# Altium PCB Copy of PCB1.PcbDoc
Units mm, origin at the board's own origin, x right, y up, seen from the top; angles counter-clockwise.
Board outline 152.4 x 101.6 mm, 2 copper layers (Top Layer, Bottom Layer); 8 components, 16 nets, 70 pads, 0 vias.
Unrouted connection lines stored in the file: 7.
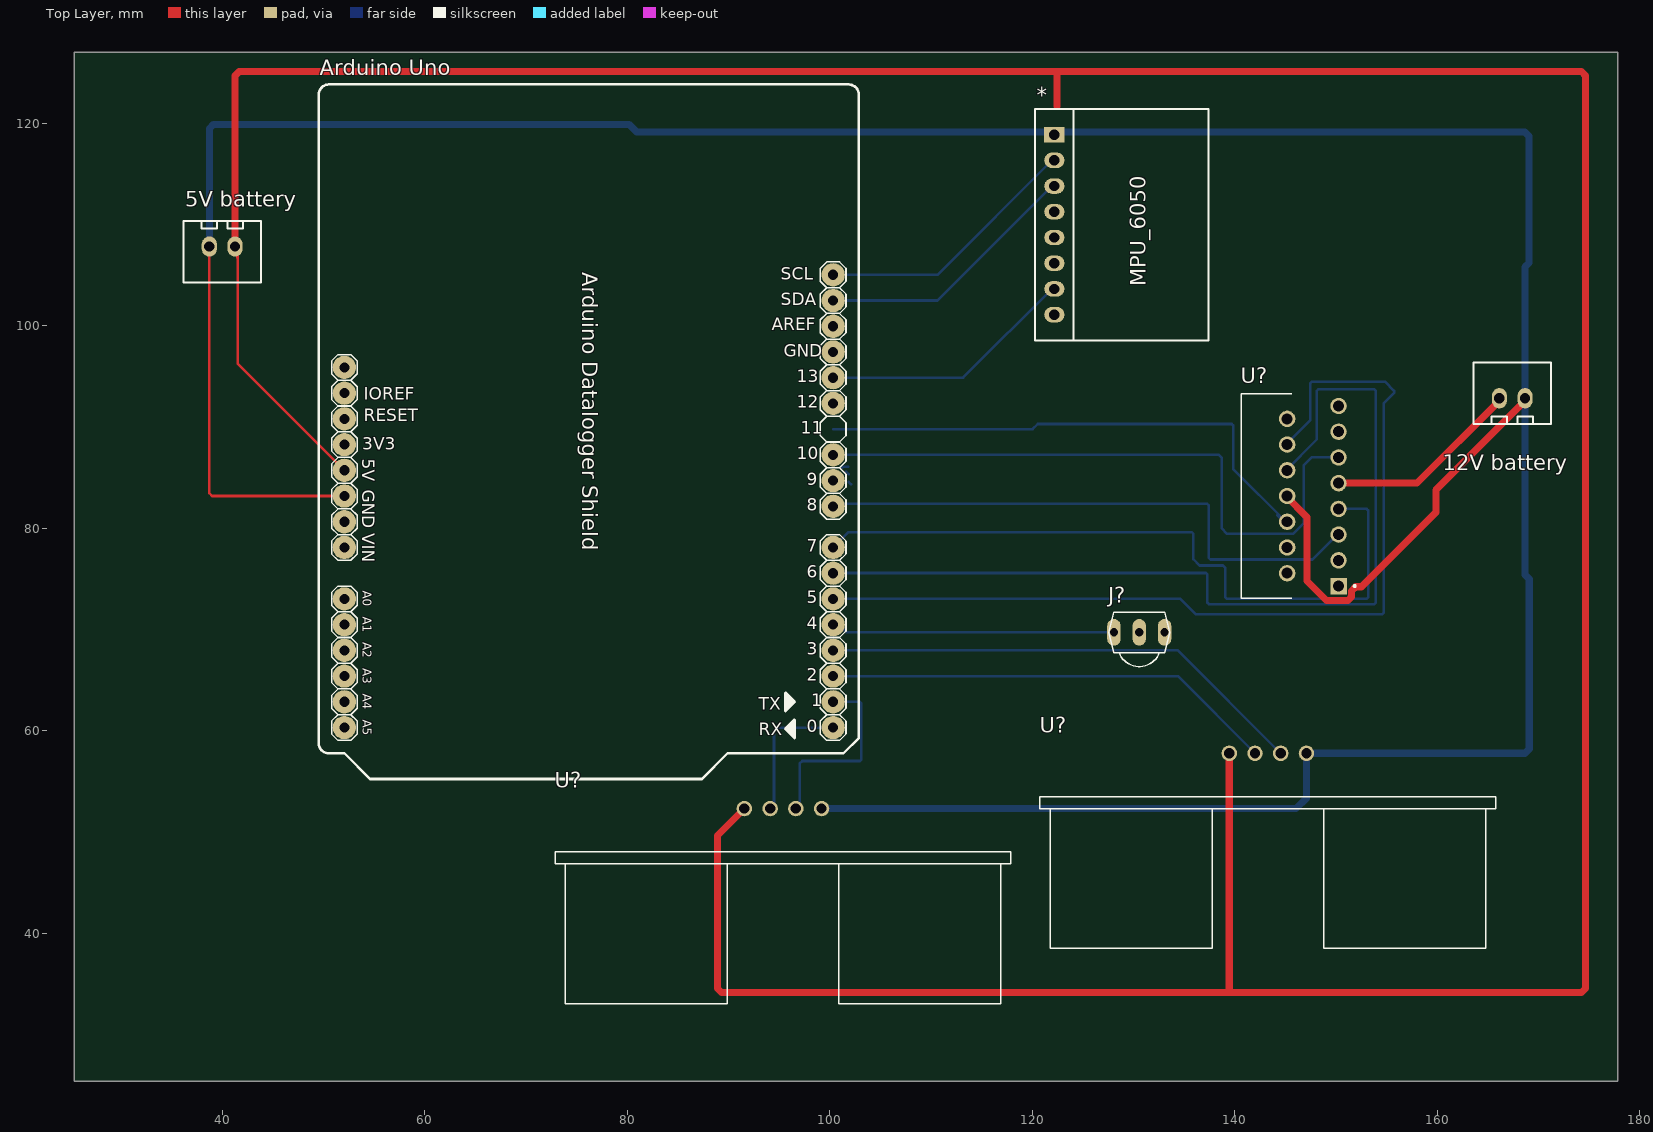
[diagram p0: Top Layer view]
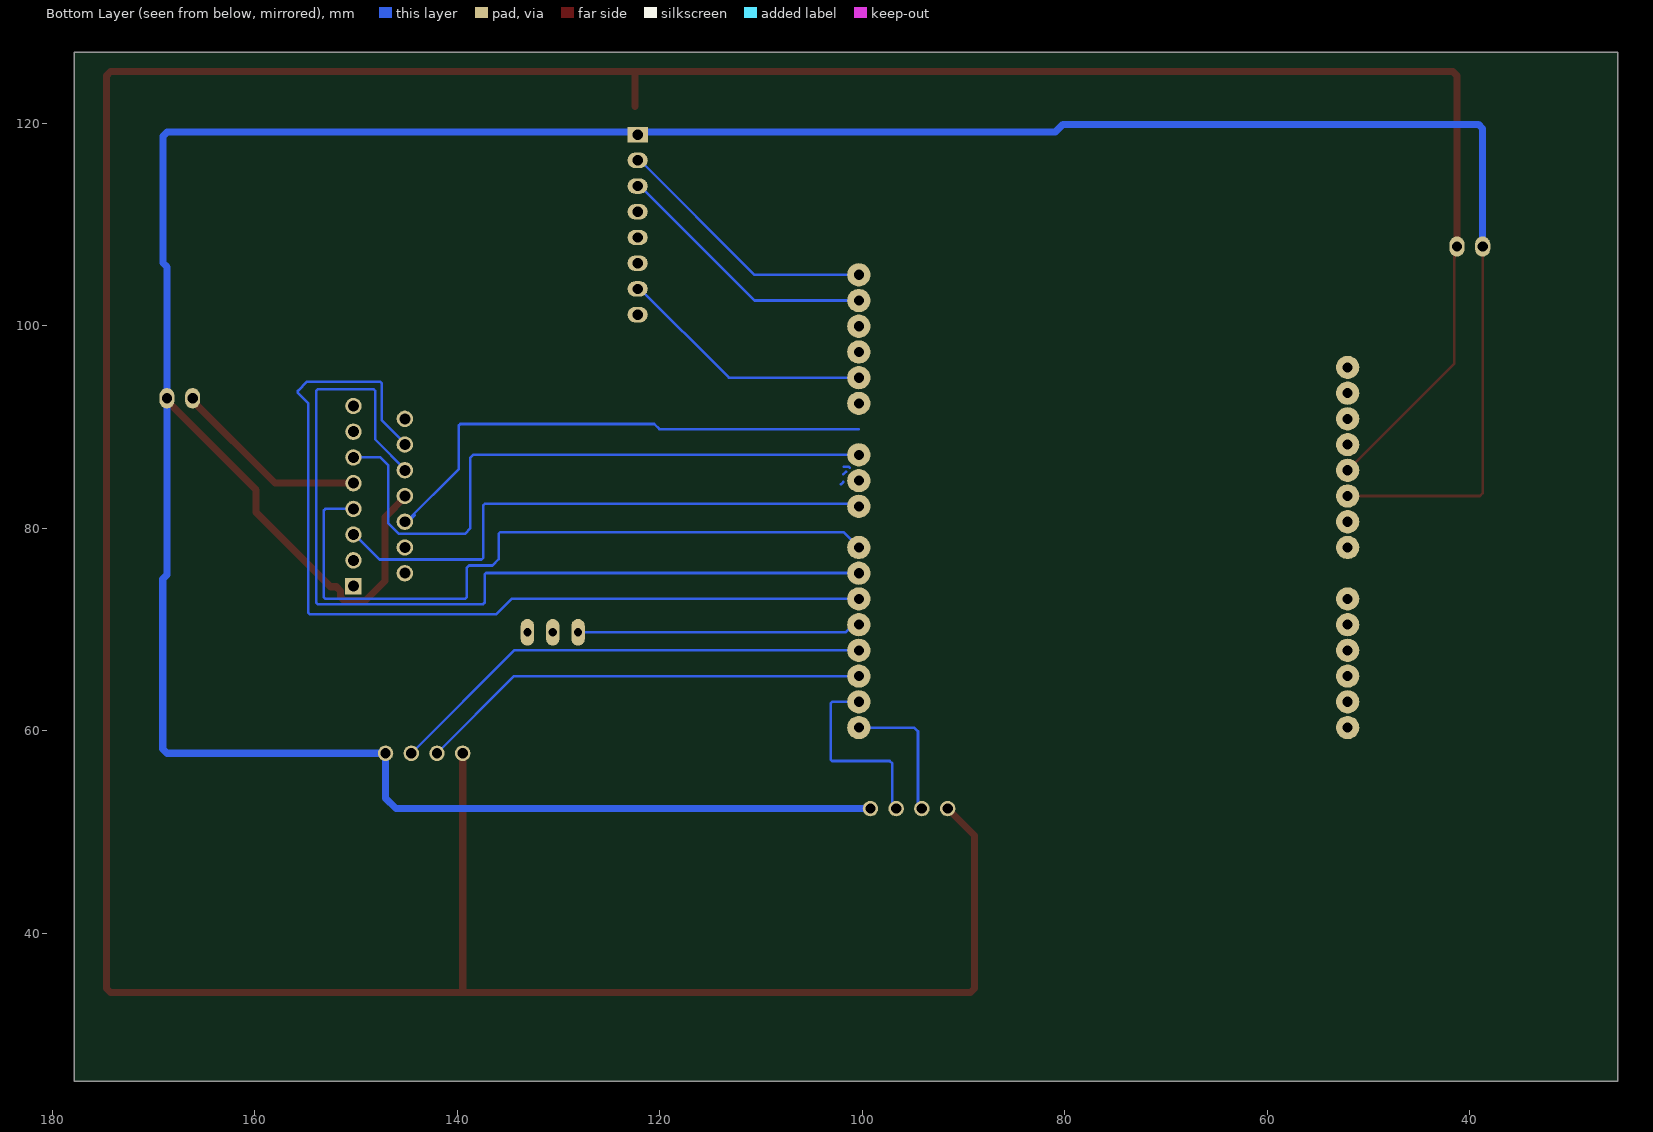
[diagram p1: Bottom Layer view, seen from below]

## Layer stack, top to bottom
Top Solder: solder mask 0.0102, Solder Resist, Dk 3.5
Top Layer: signal copper 0.0356
Dielectric 1: dielectric 0.32, FR-4, Dk 4.8
Bottom Layer: signal copper 0.0356
Bottom Solder: solder mask 0.0102, Solder Resist, Dk 3.5

## Board outline
25.4,25.4 177.8,25.4 177.8,127 25.4,127

## Design rules (kind name [scope] priority, off if disabled: settings)
Clearance [All] p1: gap=0.254 ignorepadtopadclearanceinfootprint=FALSE except(0: Arc-Hole Track-Hole SMDPad-Hole THPad-Hole Via-Hole Fill-Hole Poly-Hole Region-Hole Text-Hole)
PolygonConnect [All] p1: connectstyle=Relief reliefconductorwidth=0.254 reliefentries=4 polygonreliefangle="90 Angle" airgapwidth=0.254
RoutingVias [All] p1: holewidth=0.711 width=1.27 viastyle="Through Hole" minholewidth=0.711 minwidth=1.27 maxholewidth=0.711 maxwidth=1.27
SolderMaskExpansion [All] p1: expansion=0.102 istentingtop=FALSE
Width [All] p1: maxlimit=1 minlimit=0.7 preferedwidth=0.8 toplayer_prefwidth=0.7 minimp=50.000000 maximp=50.000000 favimp=50.000000
30 further rules are at their usual default settings.

## Classes and differential pairs
component class Sheet1: * "Arduino Uno" J? U?

## Components (designator, comment, footprint, x,y, rotation, side; value= is the part's Value field where it differs from the comment)
"5V battery" "5V battery" DATA_PIN_HEADER_2_2.54m 40.005,107.823 r180 top (schematic designator D*)
"12V battery" "5V battery" DATA_PIN_HEADER_2_2.54m 167.386,92.837 r0 top (schematic designator D*)
* "MPU_6050" MPU6050 122.174,109.982 r90 top
"Arduino Uno" "ARDUINO UNO" "ARDUINO UNO" 76.07,87.765 r270 top
J? "TSOP1838" TSOP18XX 130.557,69.75 r0 top
U? "HC-SR04" XCVR_HC-SR04 143.256,57.785 r0 top
U? "HC-SR04" XCVR_HC-SR04 95.377,52.324 r0 top
U? "L298N" TO127P2020X500X2100-15 150.241,74.295 r180 top

## Footprints (in the part's own frame and the unit in brackets; to place one, negate y for a bottom-side part, rotate by r counter-clockwise, add the part's x,y. Pads: shape width x height; smd on the part's side, far side on the other; paste and mask are expansions set on the pad)
"ARDUINO UNO" [mm]
  round 2.3 hole 1: 0(27.44,24.26) 1(24.9,24.26) 2(22.36,24.26) 3(19.82,24.26) 3.3V(-0.5,-24) 4(17.28,24.26) 5(14.74,24.26) 5V(2.04,-24) 6(12.2,24.26) 7(9.66,24.26) 8(5.596,24.26) 9(3.056,24.26) 10(0.516,24.26) 12(-4.564,24.26) 13(-7.104,24.26) A0(14.74,-24) A1(17.28,-24) A2(19.82,-24) A3(22.36,-24) A4(24.9,-24) A5(27.44,-24) AREF(-12.184,24.26) GND1(7.12,-24) GND2(4.58,-24) GND3(-9.644,24.26) IOREF(-5.58,-24) NC(-8.12,-24) RST(-3.04,-24) SCL(-17.264,24.26) SDA(-14.724,24.26) Vin(9.66,-24)
  round 2.3 on Mech15: 11(-2.024,24.26)
  silkscreen extent -36.06,-26.54 32.52,26.8
DATA_PIN_HEADER_2_2.54m [mm]
  oval 1.5x2 hole 1.016: 1(-1.27,0) 2(1.27,0)
  silkscreen extent -3.81,-2.54 3.81,3.56, body extent -3.59,-2.54 3.81,3.21, height 7.01
MPU6050 [mm]
  oval 1.524x2 hole 1.02: ADO(-6.35,0) GND(6.35,0) INT(-8.89,0) SCL(3.81,0) SDA(1.27,0) XCL(-3.81,0) XDA(-1.27,0)
  rect 1.524x2 hole 1.02: VCC(8.89,0)
  silkscreen extent -11.43,-15.24 11.43,1.91, body extent -10.55,-14.6 10.55,1.27, height 14.64
TO127P2020X500X2100-15 [mm]
  rect 1.62x1.62 hole 1.08: 1(0,0)
  round 1.62 hole 1.08: 2(5.08,-1.27) 3(0,-2.54) 4(5.08,-3.81) 5(0,-5.08) 6(5.08,-6.35) 7(0,-7.62) 8(5.08,-8.89) 9(0,-10.16) 10(5.08,-11.43) 11(0,-12.7) 12(5.08,-13.97) 13(0,-15.24) 14(5.08,-16.51) 15(0,-17.78)
  silkscreen extent -1.69,-18.99 9.63,1.21
TSOP18XX [mil]
  oval 52x104 hole 32: GND(-0.05,-1.05) OUT(-98.47,-1.05) VCC(98.38,-1.05)
  silkscreen extent -118,-134 118,78
XCVR_HC-SR04 [mm]
  round 1.53 hole 1.02: 1(-3.81,0) 2(-1.27,0) 3(1.27,0) 4(3.81,0)
  silkscreen extent -22.5,-19.27 22.5,-4.27

## Part data
"5V battery" "12V battery": library part DATA_PIN_HEADER_2_2.54m
J?: "IR Receiver and Demodulator", Package=None, Availability=Unavailable, MP=TSOP1838, Price=None
U? U?: "Ultrasonic Sensor Module", Package=None, Availability=Unavailable, MP=HC-SR04, Price=None
U?: "Dual Full Bridge Motor Driver 15-Pin(15+Tab) MULTIWATT V Tube", Package=None, Availability=Unavailable, MP=L298N, Price=None

## Nets (pads, with @x,y where several pads share a name; then routed paths per layer and width w, separated by ;. In a path a pad name is that pad's centre, name@x,y a point inside that pad or via, vN(x,y) a via of type N, cw(c..) or ccw(c..) an arc to the next point about the centre after c; other vN are vias at no path point)
+5: "5V battery.1" "Arduino Uno.5V" *.VCC J?.VCC U?.1@91.567,52.324 U?.1@139.446,57.785 | length 399.2
  Top Layer w0.254: 41.275,107.823 41.513,107.585 41.513,106.696 41.529,106.68 41.529,96.266 52.07,85.725
  Top Layer w0.7: 41.275,107.823 41.275,124.685 41.685,125.095 122.428,125.095 ; U?.1@91.567,52.324 88.9,49.657 88.9,34.573 89.31,34.163 139.446,34.163 ; 122.428,121.666 122.428,125.095 ; U?.1@139.446,57.785 139.446,34.163 ; 122.428,125.095 174.215,125.095 174.625,124.685 174.625,34.573 174.215,34.163 139.446,34.163
+12: "12V battery.1" U?.9 | length 19.6
  Top Layer w0.7: U?.9@150.114,84.455 157.984,84.455 166.116,92.587 166.116,92.837
ECHO1: "Arduino Uno.1" U?.3@96.647,52.324 | length 19.2
  Bottom Layer w0.254: U?.3@97.028,52.197 97.028,56.769 97.282,57.023 102.975,57.023 103.124,57.172 103.124,62.716 102.975,62.865 100.33,62.865
Echo2: "Arduino Uno.2" "Arduino Uno.3" U?.2@141.986,57.785 U?.3@144.526,57.785 | length 93.2
  Bottom Layer w0.254: 100.33,65.405 134.366,65.405 U?.2@141.986,57.785 ; 100.33,67.945 134.366,67.945 U?.3@144.526,57.785
ENA: "Arduino Uno.11" U?.6 | length 53.2
  Bottom Layer w0.254: 100.33,89.789 120.027,89.789 120.535,90.297 139.678,90.297 139.827,90.148 139.827,85.852 145.034,80.645 144.837,80.645 144.202,81.28 ; 101.209,85.963 101.336,86.09 101.833,86.09
ENB: "Arduino Uno.10" U?.11 | length 63.6
  Bottom Layer w0.254: 100.33,87.249 138.408,87.249 138.684,86.973 138.684,80.01 139.24,79.454 145.748,79.454 146.812,80.518 146.812,86.233 147.574,86.995 U?.11@150.114,86.995
GND: "5V battery.2" "12V battery.2" "Arduino Uno.GND2" *.GND J?.GND U?.4@99.187,52.324 U?.4@147.066,57.785 U?.8 | length 357.8
  Top Layer w0.254: 38.735,107.823 38.735,83.461 39.011,83.185 52.07,83.185
  Top Layer w0.7: U?.8@145.034,83.185 147.132,81.087 147.132,74.803 149.054,72.881 151.174,72.881 151.528,73.235 151.528,73.815 151.938,74.225 152.518,74.225 159.839,81.545 159.839,83.77 168.656,92.587 168.656,92.837
  Bottom Layer w0.7: 38.735,107.823 38.735,119.478 39.145,119.888 80.175,119.888 80.937,119.126 122.428,119.126 168.627,119.126 169.037,118.716 169.037,106.2 168.656,105.819 168.656,92.837 168.656,75.41 169.063,75.003 169.063,58.195 168.653,57.785 147.066,57.785 147.066,53.34 146.05,52.324 U?.4@99.187,52.324
IN1: "Arduino Uno.8" U?.5 | length 56.2
  Bottom Layer w0.254: 100.33,82.169 100.584,82.423 137.265,82.423 137.414,82.274 137.414,77.089 137.589,76.914 147.653,76.914 U?.5@150.114,79.375
IN2: "Arduino Uno.7" U?.7 | length 71.9
  Bottom Layer w0.254: 100.33,78.105 101.854,79.629 135.741,79.629 135.89,79.48 135.89,76.962 136.525,76.327 138.811,76.327 139.065,76.073 139.065,73.174 139.214,73.025 153.013,73.025 153.162,73.174 153.162,81.766 153.013,81.915 U?.7@150.114,81.915 ; 101.588,85.582 101.622,85.582 101.861,85.343 ; 101.861,84.581 102.114,84.328
IN3: "Arduino Uno.6" U?.10 | length 92.6
  Bottom Layer w0.254: 100.33,75.565 100.352,75.587 137.138,75.587 137.287,75.438 137.287,72.666 137.436,72.517 153.775,72.517 153.924,72.666 153.924,93.577 153.775,93.726 148.231,93.726 148.082,93.577 148.082,88.773 U?.10@145.034,85.725
IN4: "Arduino Uno.5" U?.12 | length 93.2
  Bottom Layer w0.254: 100.33,73.025 134.62,73.025 136.144,71.501 154.537,71.501 154.686,71.65 154.686,92.329 155.724,93.367 155.724,93.577 154.813,94.488 147.596,94.488 147.447,94.339 147.447,90.678 U?.12@145.034,88.265
INT: "Arduino Uno.13" *.INT | length 25.8
  Bottom Layer w0.254: 100.33,94.869 113.173,94.869 122.19,103.886 122.428,103.886
out: "Arduino Uno.4" J?.OUT | length 28
  Bottom Layer w0.254: 100.33,70.485 100.884,70.485 101.646,69.723 J?.OUT
SCL: "Arduino Uno.SCL" *.SCL | length 26.9
  Bottom Layer w0.254: 100.33,105.029 110.633,105.029 122.19,116.586 122.428,116.586
SDA: "Arduino Uno.SDA" *.SDA | length 26.9
  Bottom Layer w0.254: 100.33,102.489 110.633,102.489 122.19,114.046 122.428,114.046
Trig1: "Arduino Uno.0" U?.2@94.107,52.324 | length 13.7
  Bottom Layer w0.254: U?.2@94.488,52.197 94.488,59.944 94.869,60.325 100.33,60.325
pads on no net: "Arduino Uno.3.3V" "Arduino Uno.9" "Arduino Uno.12" "Arduino Uno.A0" "Arduino Uno.A1" "Arduino Uno.A2" "Arduino Uno.A3" "Arduino Uno.A4" "Arduino Uno.A5" "Arduino Uno.AREF" "Arduino Uno.GND1" "Arduino Uno.GND3" "Arduino Uno.IOREF" "Arduino Uno.NC" "Arduino Uno.RST" "Arduino Uno.Vin" *.ADO *.XCL *.XDA U?.1@150.241,74.295 U?.2@145.161,75.565 U?.3@150.241,76.835 U?.4@145.161,78.105 U?.13 U?.14 U?.15

## Text inside footprints (layer, text, board x,y; h text height)
"Arduino Uno": Top Overlay "5V" at 53.848,86.868 h1.21 r270; Top Overlay "A0" at 53.873,73.812 h0.86 r270; Top Overlay "AREF" at 94.273,99.579 h1.21; Top Overlay "GND" at 95.456,96.937 h1.21; Top Overlay "RESET" at 53.975,90.551 h1.21; Top Overlay "3V3" at 53.848,87.757 h1.21; Top Overlay "A1" at 53.873,71.272 h0.86 r270; Top Overlay "A2" at 53.873,68.732 h0.86 r270; Top Overlay "A3" at 53.873,66.192 h0.86 r270; Top Overlay "A4" at 53.873,63.652 h0.86 r270; Top Overlay "A5" at 53.873,61.112 h0.86 r270; Top Overlay "VIN" at 53.848,79.502 h1.21 r270; Top Overlay "GND" at 53.848,83.795 h1.21 r270; Top Overlay "IOREF" at 53.975,92.71 h1.21; Top Overlay "TX" at 92.989,62.103 h1.21; Top Overlay "RX" at 92.964,59.563 h1.21; Top Overlay "13" at 96.739,94.422 h1.21; Top Overlay "12" at 96.739,91.882 h1.21; Top Overlay "11" at 97.142,89.342 h1.21; Top Overlay "10" at 96.739,86.802 h1.21; Top Overlay "9" at 97.746,84.262 h1.21; Top Overlay "8" at 97.746,81.722 h1.21; Top Overlay "7" at 97.746,77.658 h1.21; Top Overlay "6" at 97.746,75.118 h1.21; Top Overlay "5" at 97.746,72.578 h1.21; Top Overlay "4" at 97.746,70.038 h1.21; Top Overlay "3" at 97.746,67.498 h1.21; Top Overlay "2" at 97.746,64.958 h1.21; Top Overlay "1" at 98.149,62.418 h1.21; Top Overlay "0" at 97.746,59.878 h1.21; Top Overlay "SCL" at 95.17,104.565 h1.21; Top Overlay "SDA" at 95.157,102.036 h1.21; Top Overlay "Arduino Datalogger Shield" at 75.57,105.265 h1.52 r270